# Altium PCB MX4.PcbDoc
Units mil, origin at the board's own origin, x right, y up, seen from the top; angles counter-clockwise.
Board outline 1595 x 835 mil, 2 copper layers (Top Layer, Bottom Layer), stack 12.8 mil thick; 54 components, 27 nets, 138 pads, 99 vias.
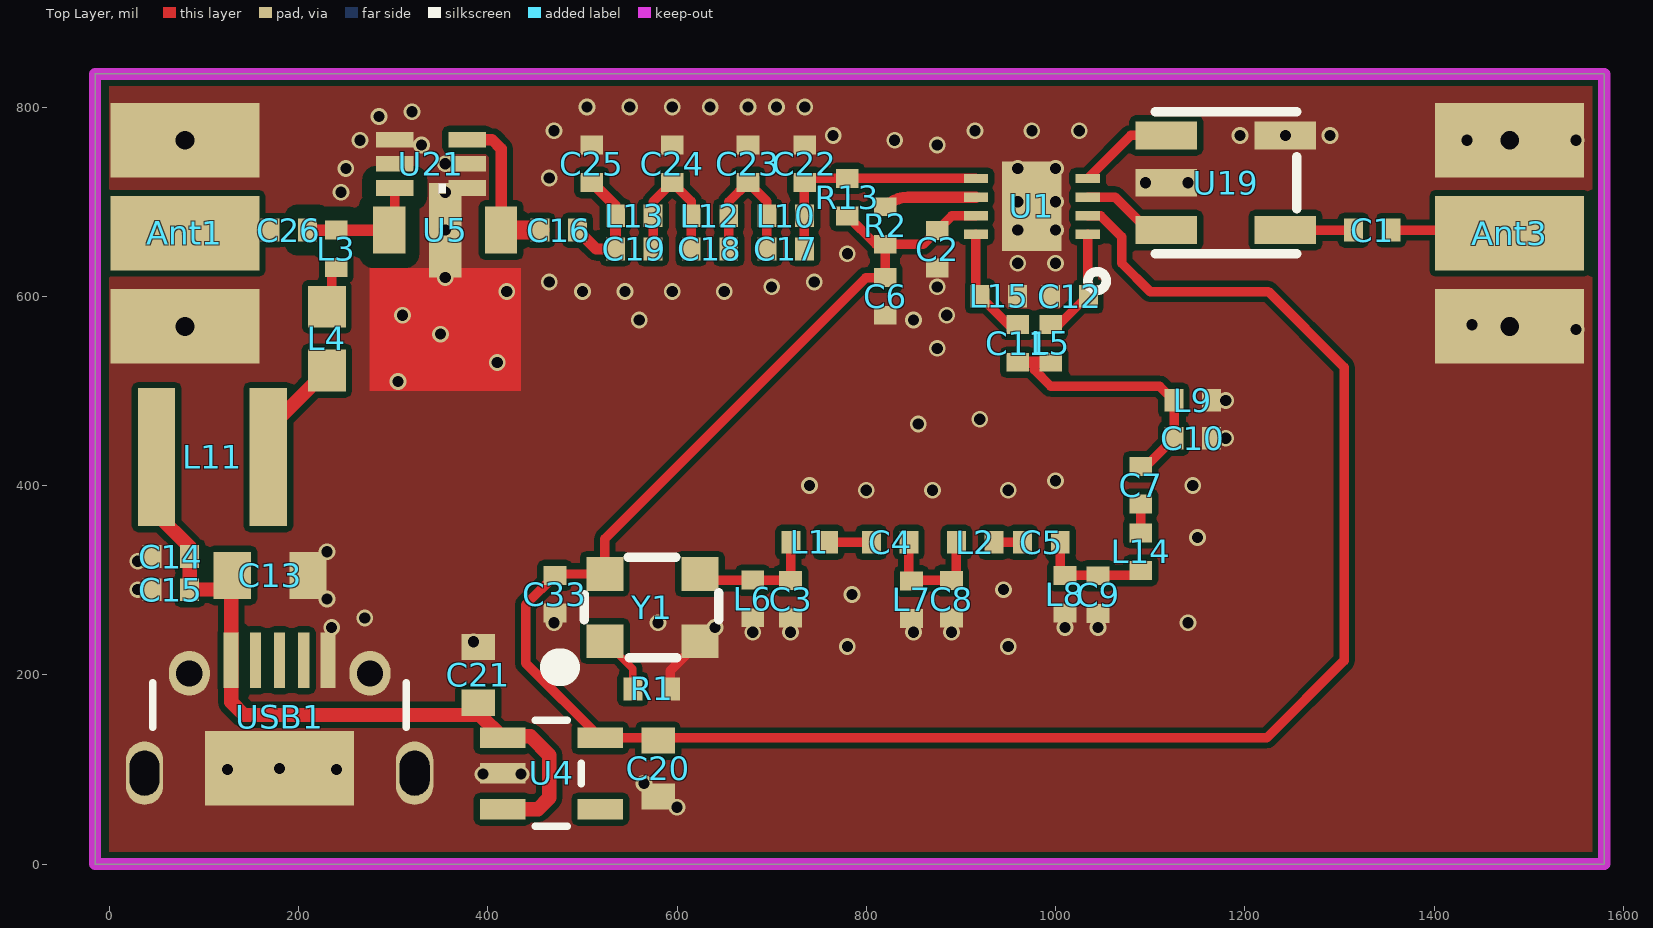
[diagram p0: Top Layer view]
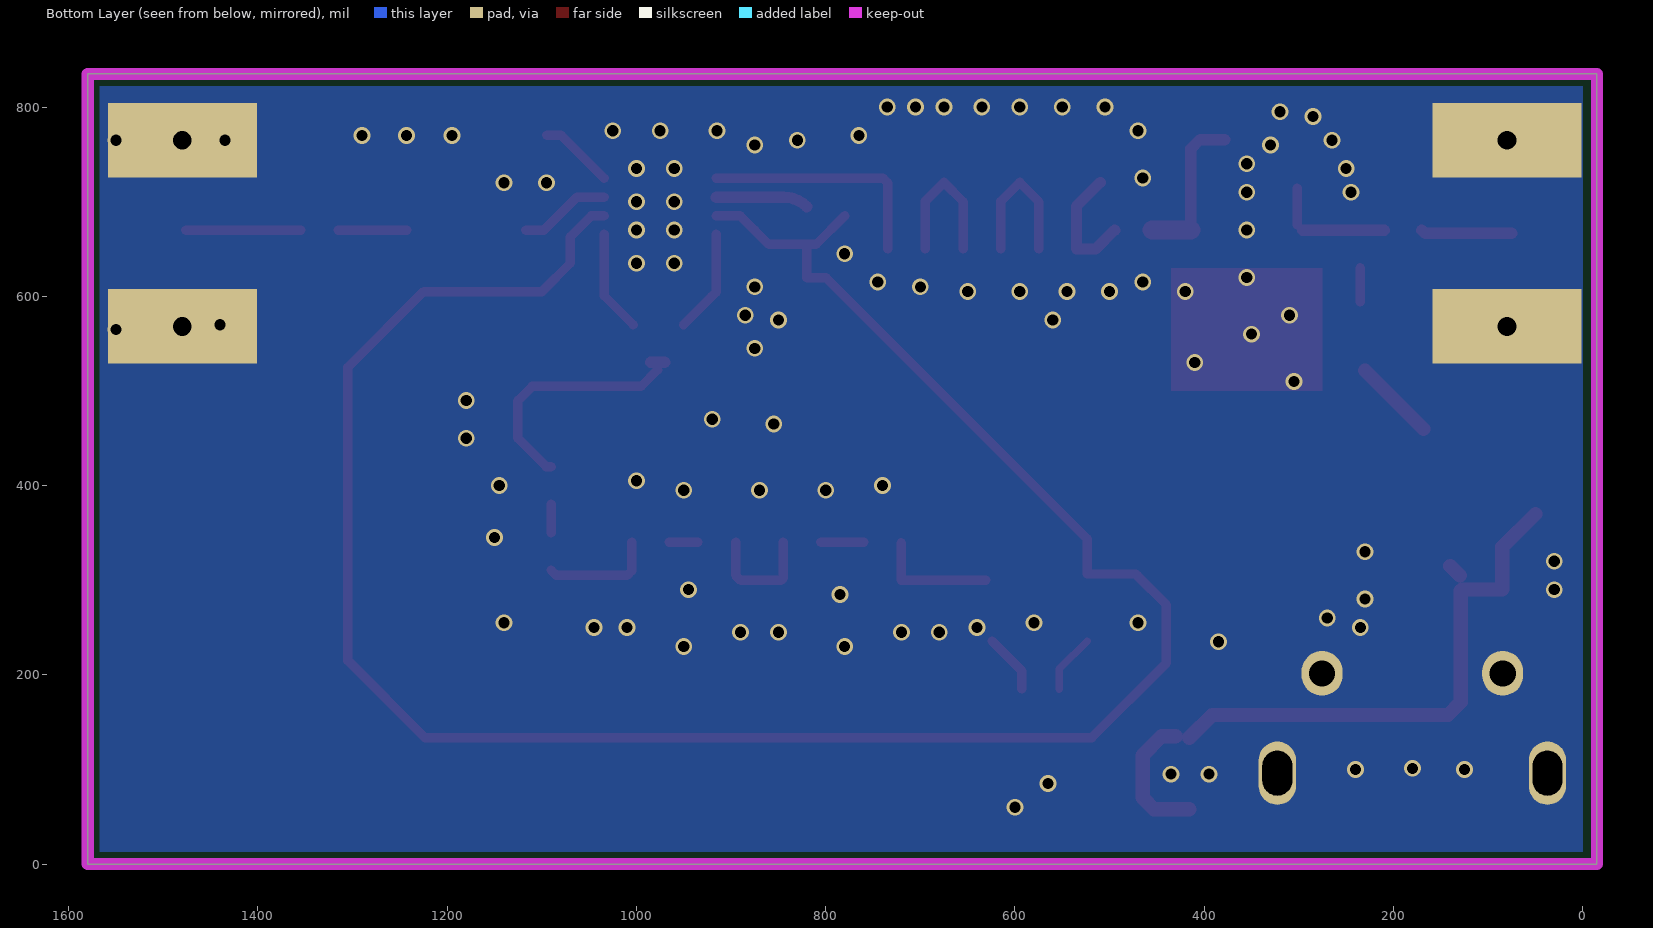
[diagram p1: Bottom Layer view, seen from below]

## Layer stack, top to bottom
Top Solder: solder mask 0.4, Solder Resist, Dk 3.8
Top Layer: signal copper 1.4
Dielectric 1: core 10, Dk 4.2
Bottom Layer: signal copper 1.4
Bottom Solder: solder mask 0.4, Solder Resist, Dk 3.8

## Board outline
-15,0 -15,835 1580,835 1580,0

## Design rules (kind name [scope] priority, off if disabled: settings)
Clearance 50R [InNetClass('50R') vs InPolygon] p1: gap=15 ignorepadtopadclearanceinfootprint=FALSE
Clearance [All] p2: gap=6 ignorepadtopadclearanceinfootprint=FALSE except(0: Arc-Hole Track-Hole SMDPad-Hole THPad-Hole Via-Hole Fill-Hole Poly-Hole Region-Hole Text-Hole)
DiffPairsRouting [All] p1: maxlimit=10 minlimit=10 mostfreqgap=10 toplayer_minwidth=5.98 toplayer_maxwidth=15 toplayer_prefwidth=15 bottomlayer_minwidth=5.98 bottomlayer_maxwidth=15 bottomlayer_prefwidth=15 maxuncoupledlength=500
MinimumSolderMaskSliver [All] p1 off: minsoldermaskwidth=10
PlaneClearance [All] p1: clearance=15
PlaneConnect [All] p1: planeconnectstyle=Direct reliefexpansion=20 reliefentries=4 reliefconductorwidth=10 reliefairgap=10
PolygonConnect [All] p1: connectstyle=Direct reliefconductorwidth=10 reliefentries=4 polygonreliefangle="90 Angle" airgapwidth=10
RoomDefinition MX [InComponentClass('MX')] p1 off: confinementstyle=ConfineIn formatcopy=TRUE lockcomponents=FALSE outline 1399.04,1282.09 10549.04,1282.09 10549.04,1632.09 1399.04,1632.09
RoutingVias [All] p1: holewidth=12 width=20 viastyle="Through Hole" minholewidth=11.81 minwidth=19.68 maxholewidth=28 maxwidth=50
SilkToBoardRegionClearance [All] p1 off:
SilkToSilkClearance [All] p1 off: silktosilkclearance=10
SilkToSolderMaskClearance [IsPad] p1 off: minsilkscreentomaskgap=10 clearancetoexposedcopper=TRUE
SolderMaskExpansion [All] p1: expansion=4
Width [All] p1: maxlimit=60 minlimit=6 preferedwidth=6
23 further rules are at their usual default settings.

## Classes and differential pairs
net class 50R: NetC26_1

## Components (designator, comment, footprint, x,y, rotation, side; value= is the part's Value field where it differs from the comment)
Ant1 "Antenna" SMA 80,765 r270 top
Ant3 "Antenna" SMA 1480,765 r270 top
C1 "100pF" 0402 1335,670 r180 top
C2 "100pF" 0402 875,650 r270 top
C3 "100pF" 0402 720,280 r270 top
C4 "100pF" 0402 825,340 r0 top
C5 "100pF" 0402 985,340 r0 top
C6 "100pF" 0402 820,600 r270 top
C7 "100pF" 0402 1090,400 r90 top
C8 "100pF" 0402 890,280 r270 top
C9 "100pF" 0402 1045,285 r270 top
C10 "100pF" 0402 1145,450 r0 top
C11 "1nF" 0402 960,550 r90 top
C12 "1nF" 0402 1015,600 r180 top
C13 "12nF" 0805 170,305 r180 top
C14 "1nF" 0402 65,325 r0 top
C15 "100pF" 0402 65,290 r0 top
C16 "1nF" 0402 475,670 r180 top
C17 "100pF" 0402 715,650 r180 top
C18 "100pF" 0402 635,650 r180 top
C19 "100pF" 0402 555,650 r180 top
C20 "4.7uF" 0603L 580,101 r90 top
C21 "4.7uF" 0603L 390,200 r270 top
C22 "100pF" 0402 735,740 r90 top
C23 "100pF" 0402 675,740 r90 top
C24 "100pF" 0402 595,740 r90 top
C25 "100pF" 0402 510,740 r90 top
C26 "1nF" 0402 190,670 r180 top
C33 "0.1uF" 0402 471,285 r90 top
L1 "Inductor" 0402 740,340 r0 top value=10nH
L2 "Inductor" 0402 915,340 r0 top value=10nH
L3 "Inductor" 0402 240,650 r90 top value=10nH
L4 "Inductor" 0603 230,555 r90 top value=10nH
L5 "Inductor" 0402 995,550 r90 top value=10nH
L6 "Inductor" 0402 680,280 r90 top value=10nH
L7 "Inductor" 0402 847.91,279.04 r90 top value=10nH
L8 "Inductor" 0402 1010,285 r90 top value=10nH
L9 "Inductor" 0402 1145,490 r180 top value=10nH
L10 "Inductor" 0402 715,685 r180 top value=10nH
L11 "2.2uH" L4015 50,430 r0 top
L12 "Inductor" 0402 635,685 r180 top value=10nH
L13 "Inductor" 0402 555,685 r180 top value=10nH
L14 "Inductor" 0402 1090,330 r90 top value=10nH
L15 "Inductor" 0402 940,600 r0 top value=10nH
R1 "NC" 0402 573,185 r0 top
R2 "NC" 0402 820,675 r270 top
R13 "NC" 0402 780,705 r270 top
U1 "LT5560" LT5560 975,695 r180 top
U4 "LP5907" SOT23-5 467,96 r270 top
U5 "AMP-SOT89" SOT-89 355,670 r180 top
U19 "TCM1-13MX+" TCM-13M+ 1180,720 r90 top
U21 "MGA81563" SC-70-6 340,740 r0 top
USB1 "USB Micro Type B" MICRO-YZX 180,-15 r0 top
Y1 "OSC_40M" TXC_7Q 574.04,271.09 r0 top

## Footprints (in the part's own frame and the unit in brackets; to place one, negate y for a bottom-side part, rotate by r counter-clockwise, add the part's x,y. Pads: shape width x height; smd on the part's side, far side on the other; paste and mask are expansions set on the pad)
0402 [mil] "0402-RES"
  rect 20x24 smd: 1(-19.69,0) 2(20,0)
0603 [mil] "0603-RES"
  rect 44x40 smd: 1(-33.46,0) 2(34,0)
  body extent -31,-16 31,16, height 31
0603L [mm]
  rect 0.7x0.9 smd: 1(-0.75,0) 2(0.75,0)
  body extent -0.8,-0.4 0.8,0.4, height 0.8
0805 [mil]
  rect 39.37x50 smd: 1(-40,0) 2(40,0)
  body extent -50,-30 50,30, height 31
L4015 [mm]
  rect 1x3.7 smd: 1(0,0) 2(3,0)
LT5560 [mm]
  rect 1.6x2.4 smd: 0(0,0)
  rect 0.65x0.25 smd: 1(-1.5,0.75) 2(-1.5,0.25) 3(-1.5,-0.25) 4(-1.5,-0.75) 5(1.5,-0.75) 6(1.5,-0.25) 7(1.5,0.25) 8(1.5,0.75)
  silkscreen extent -2,1.75 -1.5,2.25, body extent -1.5,-1.5 1.5,1.5, height 0.75
MICRO-YZX [mm]
  rect 0.4x1.5 smd: 1(-1.3,5.85) 5(1.3,5.85)
  rect 0.3x1.5 smd: 2(-0.65,5.85) 3(0,5.85) 4(0.65,5.85)
  oval 1x1.7 hole 0.8 slot 1.2 at 90 deg: 5(-3.625,2.82) 5(3.625,2.82)
  oval 1.1x1.2 hole 0.7: 5(-2.425,5.5) 5(2.425,5.5)
  rect 4x2 smd: 5(0,2.95)
  silkscreen extent -3.4,4.05 3.4,5.25, body extent -4.02,0.33 3.98,5.93, height 2.6
SC-70-6 [mm]
  rect 1x0.42 smd mask+0.051: 1(0.97,-0.65) 2(0.97,0) 3(0.97,0.65) 4(-0.97,0.65) 5(-0.975,0) 6(-0.97,-0.65)
  silkscreen extent 0.2,-0.8 0.4,-0.53
SMA [mm]
  rect 2x4 smd: 1(2.5,0)
  rect 2x4 hole 0.5: GND(0,0) GND(5,0)
SOT23-5 [mil] "SOT23-5"
  rect 22x48 smd: 1(-37.4,-51.19) 2(0,-51.19) 3(38,-51.19) 4(38,52) 5(-37.4,52)
  silkscreen extent -56,-17 56,32, body extent -57,-55 57,55, height 47
SOT-89 [mil]
  rect 34x50 smd: 1(-59.06,0) 3(59.06,0)
  rect 34x100 smd: 2(0,0)
  Top Layer region: -80,40 80,40 80,170 -80,170
  body extent -89,-22 89,147, height 59
TCM-13M+ [mm]
  rect 0.75x1.65 smd: 1(-1.27,1.6) 2(0,1.6) 3(1.27,1.6) 4(1.27,-1.6) 5(-1.27,-1.6)
  silkscreen extent -1.9,-1.9 1.9,1.9
TXC_7Q [mm]
  rect 1x0.9 smd: 1(-1.275,-0.9) 2(1.275,-0.9) 3(1.275,0.9) 4(-1.275,0.9)
  silkscreen extent -2.52,-1.6 1.78,1.35

## Part data
C1 C2 C3 C4 C5 C6 C7 C8 C9 C10 C11 C12 C13 C14 C15 C16 C17 C18 C19 C22 C23 C24 C25 C26 C33: library part CAP0402-CAP, "<b>Capacitor</b> / Standard 0603 ceramic capacitor, and 0.1\" leaded capacitor.", PARTNO=CC0402ZRY5V7BB104
C20 C21: library part Cap, "Capacitor", LatestRevisionDate=17-Jul-2002, LatestRevisionNote="Re-released for DXP Platform.", PackageDescription="Radial Cap, Thru-Hole; 2 Leads; 0.3 in Pin Spacing", PackageReference=RAD-0.3, Published=8-Jun-2000, Publisher="Altium Limited"
L11: library part Inductor, "Inductor", Code_IEC=1005, Code_JEITA=0402, LatestRevisionDate=29-May-2009, LatestRevisionNote="IPC-7351 Footprint Added.", PackageDescription="Chip Inductor", PackageReference=0402-A, Published=8-Jun-2000, Publisher="Altium Limited"
R1 R2 R13: library part Res2, "Resistor", LatestRevisionDate=17-Jul-2002, LatestRevisionNote="Re-released for DXP Platform.", PackageDescription="Axial Device, Thru-Hole; 2 Leads; 0.4 in Pin Spacing", PackageReference=AXIAL-0.4, Published=8-Jun-2000, Publisher="Altium Limited"
U19: library part TCM-63AX+
USB1: library part USB_Micro_TypeB, "Connector SMD USB Micro Type B middle mount", Manufacturer 1="Molex Inc", Manufacturer Part Number 1=47491-0001, Package / Case=SMD, Supplier Part Number 1=WM17142CT-ND, SCDType=undef, Supplier 1=Digi-Key
L1 L2 L3 L4 L5 L6 L7 L8 L9 L10 L12 L13 L14 L15: Code_IEC=1005, Code_JEITA=0402, LatestRevisionDate=29-May-2009, LatestRevisionNote="IPC-7351 Footprint Added.", PackageDescription="Chip Inductor", PackageReference=0402-A, Published=8-Jun-2000, Publisher="Altium Limited"

## Via types
v1: diameter 17.72, hole 11.81, Top Layer to Bottom Layer, 99 vias

## Nets (pads, with @x,y where several pads share a name; then routed paths per layer and width w, separated by ;. In a path a pad name is that pad's centre, name@x,y a point inside that pad or via, vN(x,y) a via of type N, cw(c..) or ccw(c..) an arc to the next point about the centre after c; other vN are vias at no path point)
3.3: C2.1 C6.1 C20.2 C33.2 R2.2 R13.2 U1.2 U1.7 U4.5 Y1.4 | length 2397.9
  Top Layer w10: R13.2 810,655 R2.2 ; U1.7 890.47,685.16 C2.1 860.32,655 R2.2 ; U1.2 1047.64,685.16 1070,662.8 1070,635 1100,605 1225,605 1305,525 1305,215 1223.4,133.4 U4.5 440,212.4 440,274 C33.2 472.52,306.52 Y1.4 523.84,343.84 799.68,619.68 C6.1 R2.2
5V: C13.2 C14.2 C15.2 C21.2 L11.1 U4.1 U4.3 USB1.1 | length 714
  Top Layer w15: L11.1@50,370 85,335 C14.2 C15.2 C13.2@127.64,290 ; C13.2@128.82,288.82 USB1.1 128.82,171.18 142.36,157.64 391.57,157.64 U4.1 ; C13.2 C13.2@140,315 ; U4.3 453,58 465,70 465,115 445,135 U4.1@430,135
GND: Ant1.GND Ant3.GND C2.2 C3.2 C6.2 C8.2 C9.2 C10.2 C12.2 C13.1 C14.1 C15.1 C20.1 C21.1 C22.2 C23.2 C24.2 C25.2 C33.1 L6.1 L7.1 L8.1 L9.1 L15.2 R1.2 U1.0 U4.2 U5.2 U19.2 U19.4 U21.1 U21.2 U21.4 U21.5 USB1.5 Y1.2 | length 63.6
  Top Layer w10: R1.2 593,204.42 Y1.2
  other v1: 600,60 565,85 395,95 435,95 125,100 240,100 180,101.14 780,230 950,230 385,235 680,245 720,245 850,245 890,245 235,250 640,250 1010,250 1045,250 470,255 580,255 1140,255 270,260 230,280 785,285 30,290 945,290 30,320 230,330 1150,345 800,395 870,395 950,395 740,400 1145,400 1000,405 1180,450 855,465 920,470 1180,490 305,510 410,530 875,545 350,560 1550,565 1440,570 560,575 850,575 310,580 885,580 420,605 500,605 545,605 595,605 650,605 700,610 875,610 465,615 745,615 355,620 960,635 1000,635 780,645 355,670 960,670 1000,670 960,700 1000,700 245,710 355,710 1095,720 1140,720 465,725 250,735 960,735 1000,735 355,740 330,760 875,760 265,765 830,765 1435,765 1550,765 765,770 1195,770 1242.99,770 1290,770 470,775 915,775 975,775 1025,775 285,790 320,795 505,800 550,800 595,800 635,800 675,800 705,800 735,800
LO_N: C11.2 L15.1 U1.8 | length 109.7
  Top Layer w10: U1.8 915.94,604.37 L15.1 C11.2@950.32,570
LO_P: C12.1 L5.2 U1.1 | length 108.2
  Top Layer w10: L5.2@1003.43,570 1034.06,600.63 U1.1
NetAnt1_1: Ant1.1 C26.2 | length 96.4
  Top Layer w12: Ant1.1@75,666.57 166.57,666.57 C26.2
NetAnt3_1: Ant3.1 C1.1 | length 121.9
  Top Layer w10: C1.1 Ant3.1@1476.57,670
NetC1_2: C1.2 U19.5 | length 72
  Top Layer w10: U19.5 C1.2
NetC3_1: C3.1 L1.1 L6.2 Y1.3 | length 128.9
  Top Layer w10: Y1.3@631.07,299.68 C3.1 L1.1@720,339.68
NetC4_1: C4.1 L1.2 | length 45.3
  Top Layer w10: L1.2 C4.1
NetC4_2: C4.2 C8.1 L2.1 L7.2 | length 126.5
  Top Layer w10: C4.2 845,301.95 847.27,299.68 C8.1 895.32,305 L2.1
NetC5_1: C5.1 L2.2 | length 30.3
  Top Layer w10: L2.2 C5.1
NetC5_2: C5.2 C9.1 L8.2 L14.1 | length 119.3
  Top Layer w10: C5.2 1005,310 L8.2 1084.68,305 L14.1
NetC7_1: C7.1 L14.2 | length 30.3
  Top Layer w10: L14.2 C7.1
NetC7_2: C7.2 C10.1 C11.1 L5.1 L9.2 | length 263.8
  Top Layer w10: 977.5,522.5 995,505 1110,505 L9.2 1125.32,489.68 C10.1 1095.32,420 C7.2
  Top Layer w12: C11.1@970,530.32 977.5,530.32 L5.1@985,530.32
NetC16_1: C16.1 C19.2 C25.1 L13.2 | length 129.3
  Top Layer w12: C16.1 514.68,650 C19.2 L13.2 535,695.32 C25.1
NetC16_2: C16.2 U5.1 U21.3 | length 166.8
  Top Layer w12: U21.3 404.41,765.59 414.06,755.94 U5.1
  Top Layer w20: U5.1 C16.2
NetC17_1: C17.1 C22.1 L10.1 R13.1 U1.5 | length 253
  Top Layer w10: C17.1 L10.1 734.68,720 C22.1 739.37,724.68 R13.1 ; R13.1@780.16,724.53 U1.5
NetC17_2: C17.2 C18.1 C23.1 L10.2 L12.1 | length 157.3
  Top Layer w10: C18.1 L12.1 654.68,700 C23.1 695,700.32 L10.2 C17.2
NetC18_2: C18.2 C19.1 C24.1 L12.2 L13.1 | length 157.3
  Top Layer w10: C19.1 L13.1 574.68,700 C24.1 615,700.32 L12.2 C18.2
NetC26_1: C26.1 L3.2 U5.3 U21.6 | length 124.8
  Top Layer w10: U5.3@301.81,675.87 U21.6
  Top Layer w12: C26.1 L3.2 U5.3
NetL3_1: L3.1 L4.2 | length 36.3
  Top Layer w10: L4.2@235,594 L3.1@235,630.32
NetL4_1: L4.1 L11.2 | length 87.5
  Top Layer w15: L11.2@168.11,459.65 L4.1
NetR1_1: R1.1 Y1.1 | length 62.9
  Top Layer w8: Y1.1 553.32,206.18 R1.1
NetR2_1: R2.1 U1.6 | length 98.7
  Top Layer w12: R2.1 cw(c844.52,670.16) 844.52,704.84 U1.6
NetU1_3: U1.3 U19.1 | length 97.4
  Top Layer w10: U1.3 1062.92,704.84 1097.76,670 U19.1
NetU1_4: U1.4 U19.3 | length 79.8
  Top Layer w10: U1.4 1079.53,770 U19.3@1095,770
pads on no net: U4.4 USB1.2 USB1.3 USB1.4

## Polygon pours and split planes (outlines as drawn)
GND on Bottom Layer "GND_L02_P000" (solid, remove dead copper, pour order 0): 0,0 1580,0 1580,835 0,835
GND on Top Layer "GND_L01_P002" (solid, remove dead copper, pour order 2): 0,0 1580,0 1580,835 0,835

## Keep-outs
Keep-Out Layer:
  the board outline again, w13

## Silkscreen, mask and mechanical layers (free items; w line width, h text height)
Top Solder:
  rectangle: 805,755 915,820
  rectangle: 880,410 990,475
  region: 646.97,356.97 700,410 661.11,448.89 608.08,395.86